# Altium PCB alpha.PcbDoc
Units mil, origin at the board's own origin, x right, y up, seen from the top; angles counter-clockwise.
Board outline 6000 x 4000 mil, 6 copper layers (Component Side, Ground Plane (GND), Inner Layer 1, Inner Layer 2, Power Plane (VCC), Solder Side), stack 51.068 mil thick; 138 components, 107 nets, 521 pads, 80 vias.
Unrouted connection lines stored in the file: 7.
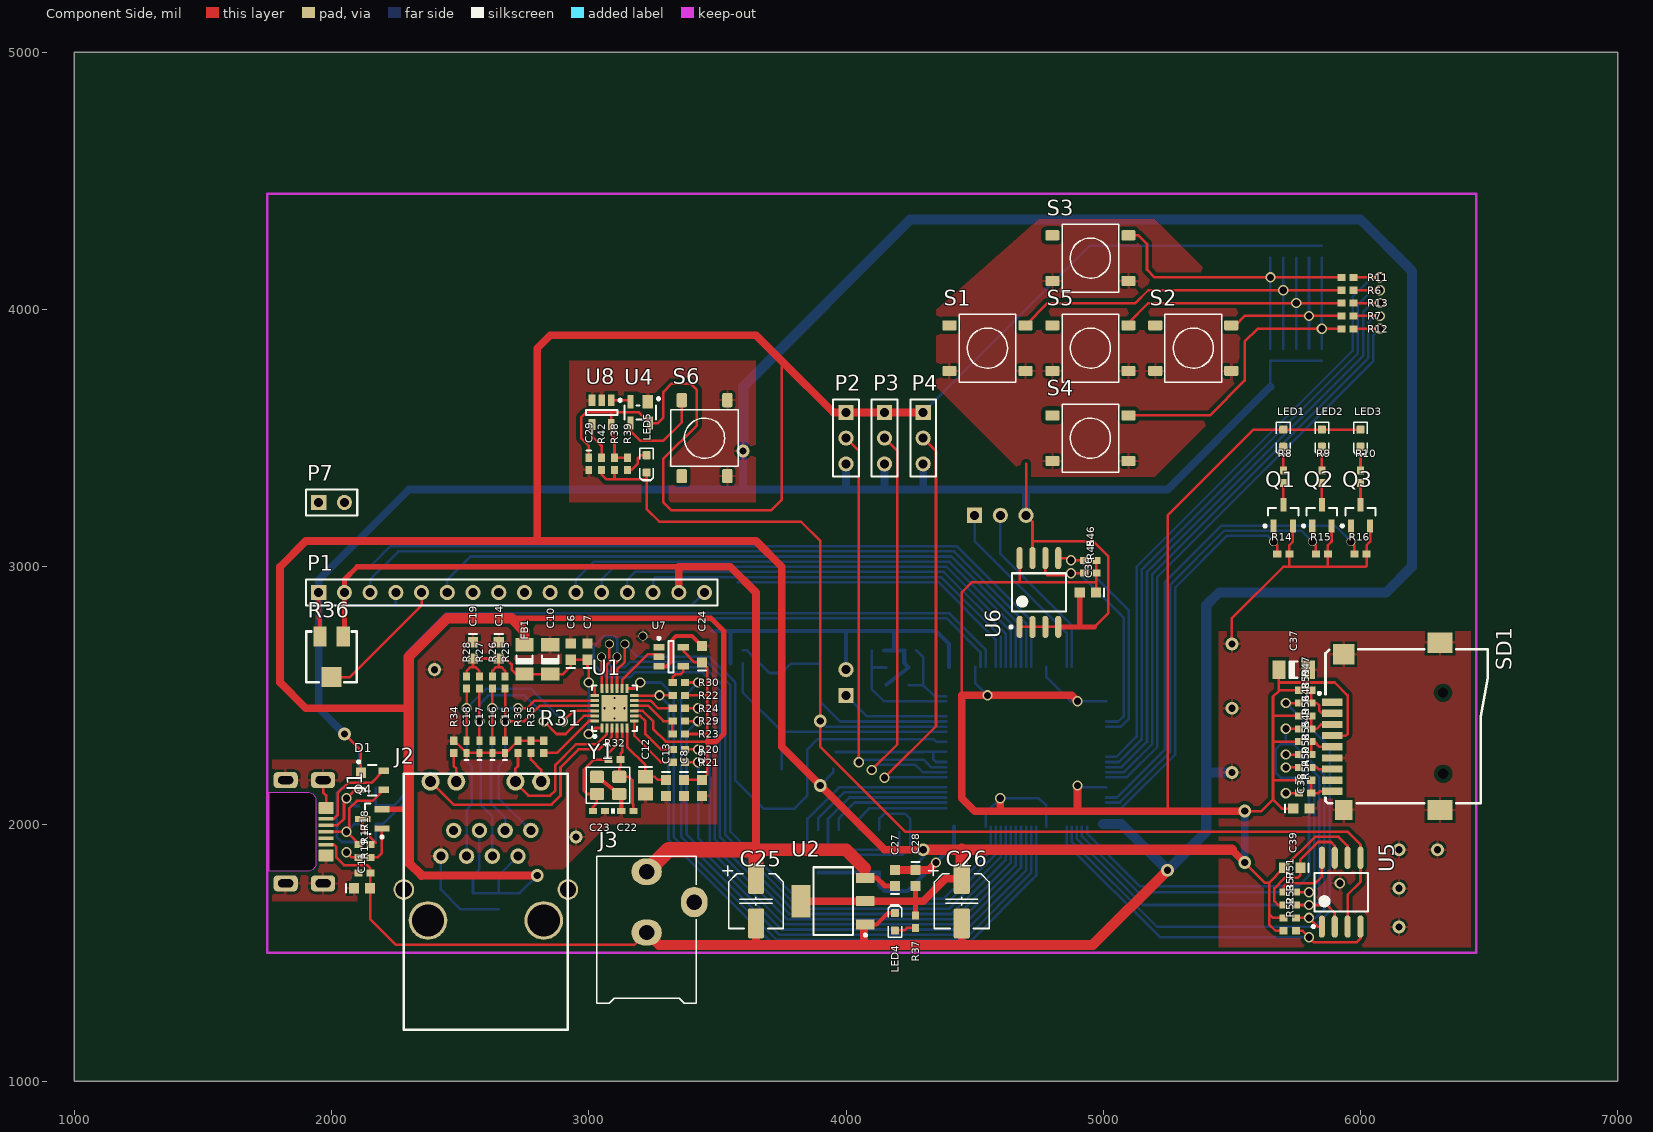
[diagram p0: Component Side view]
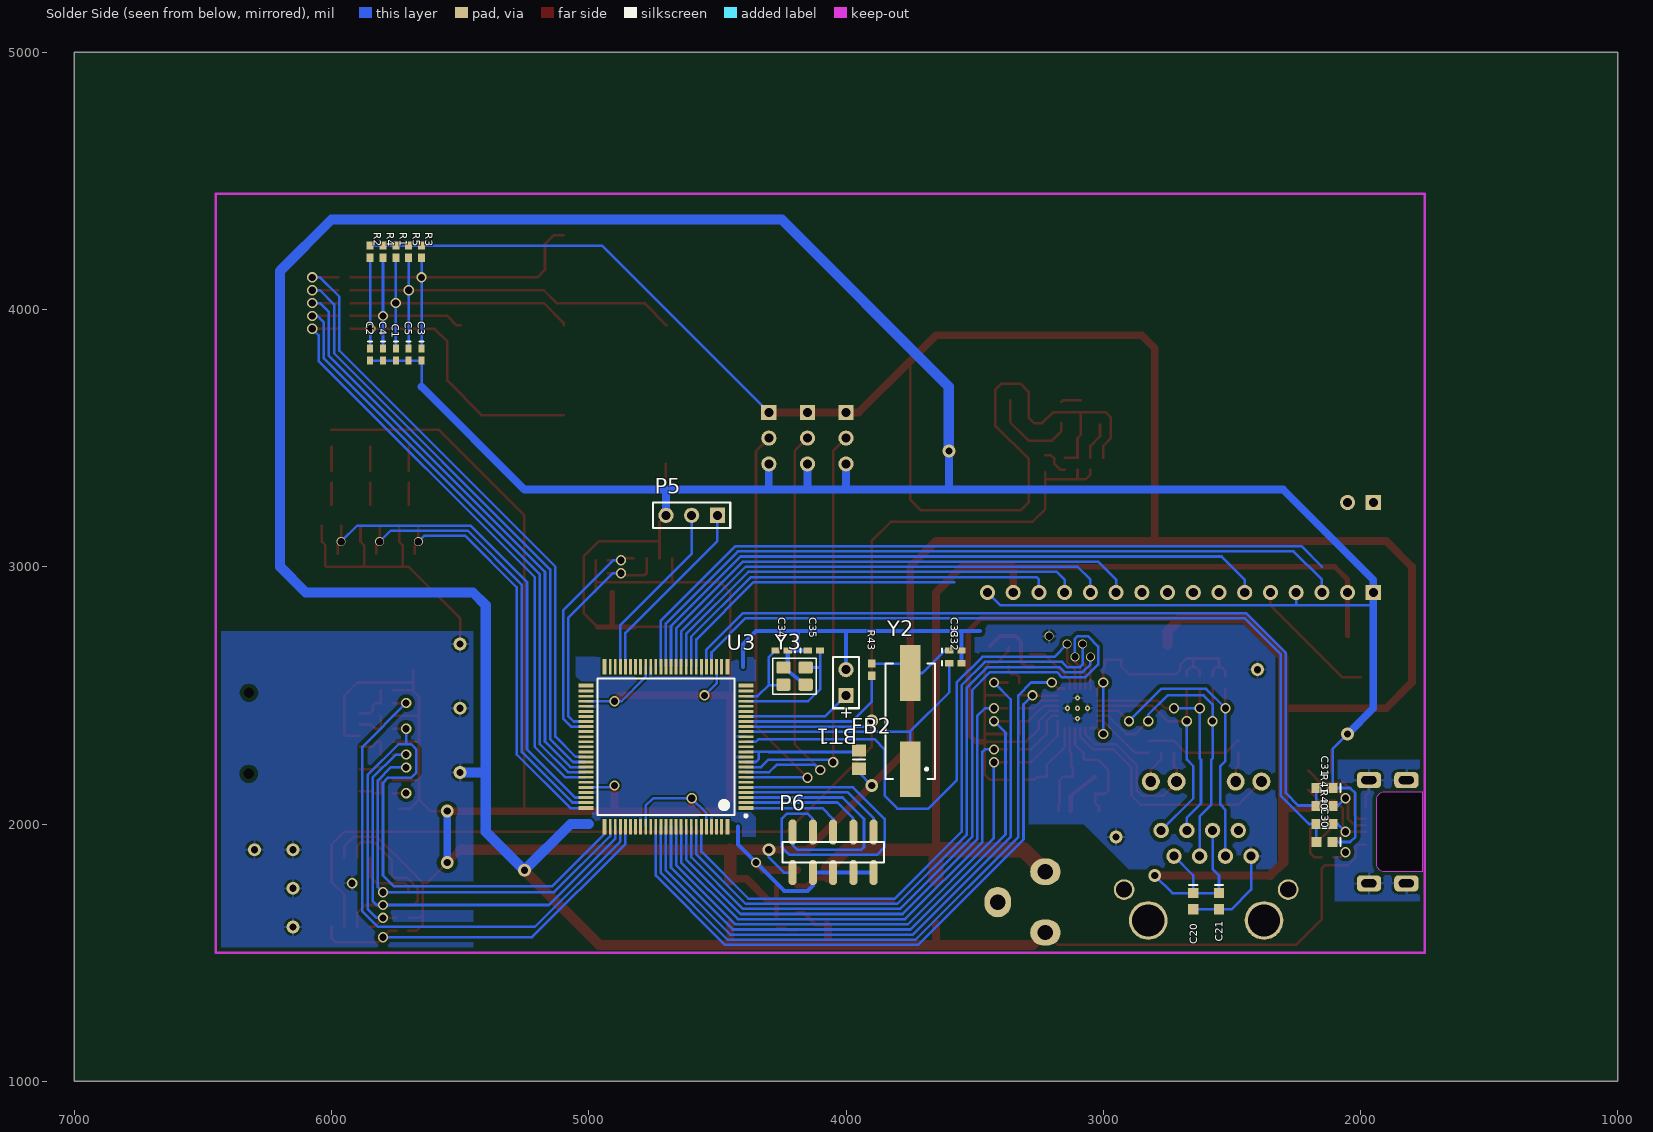
[diagram p1: Solder Side view, seen from below]
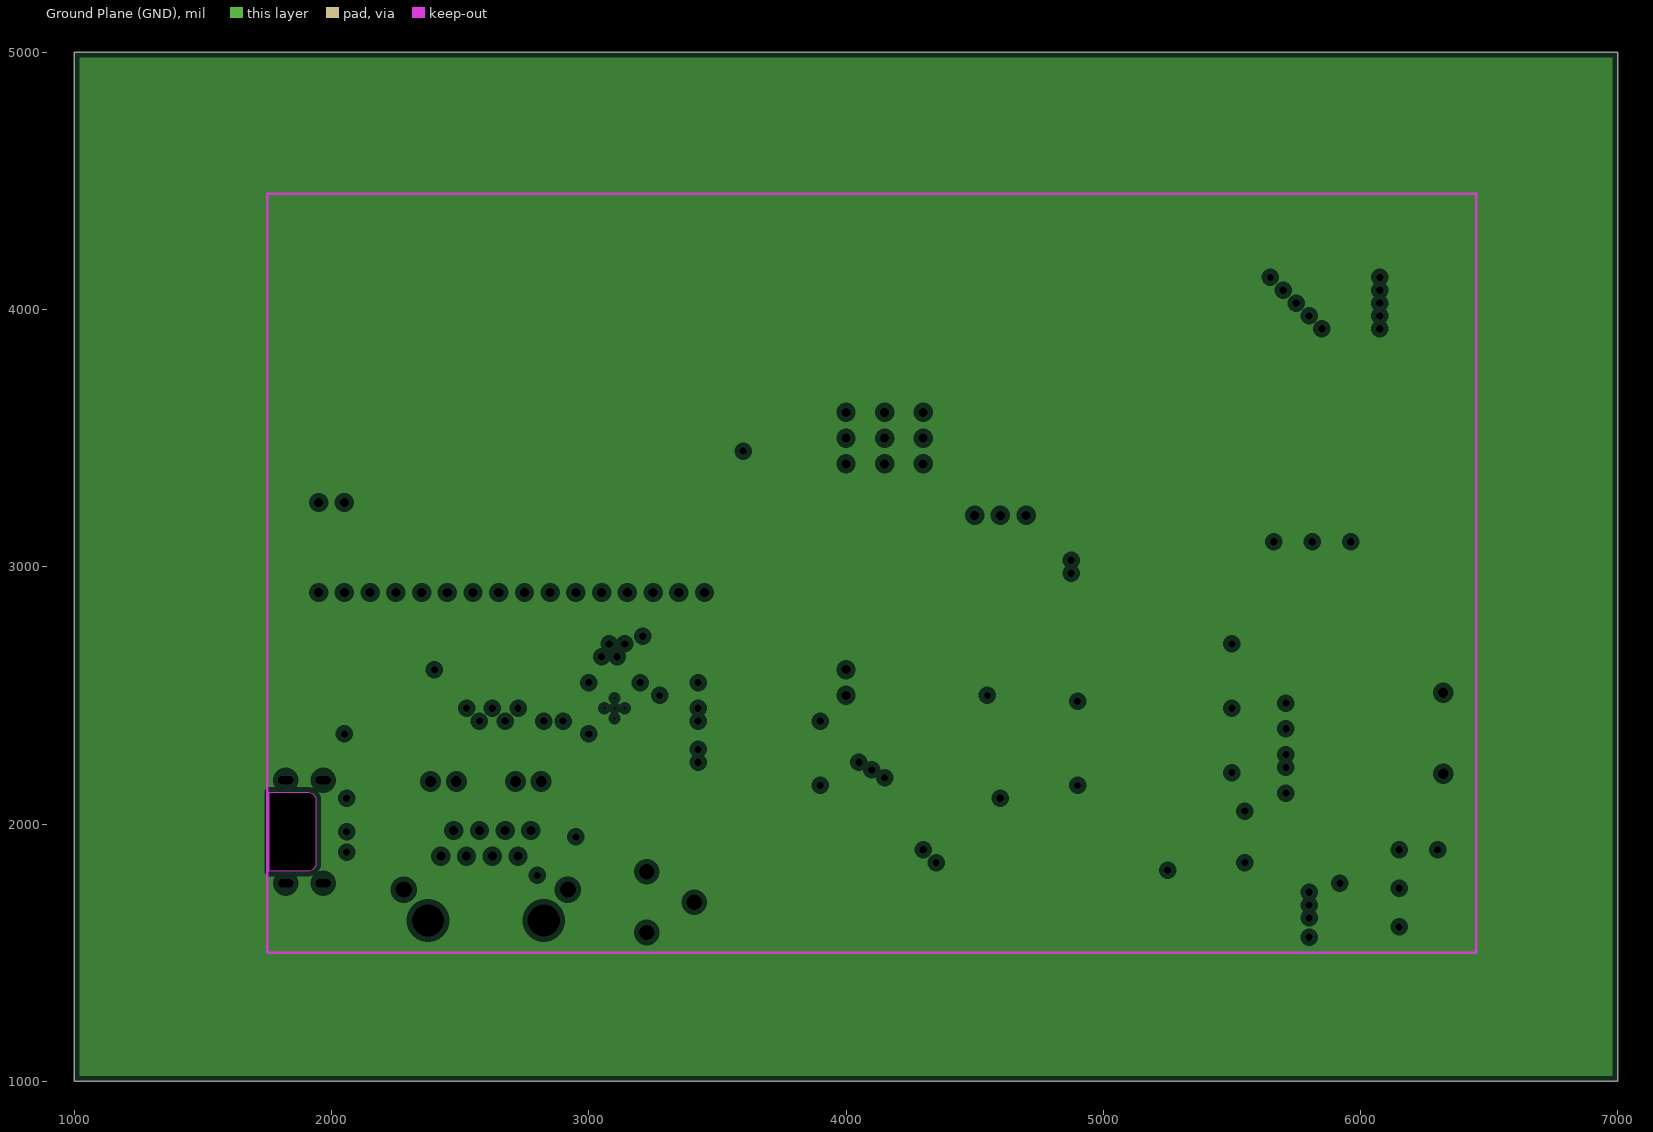
[diagram p2: Ground Plane (GND), clearances drawn from the general rule]
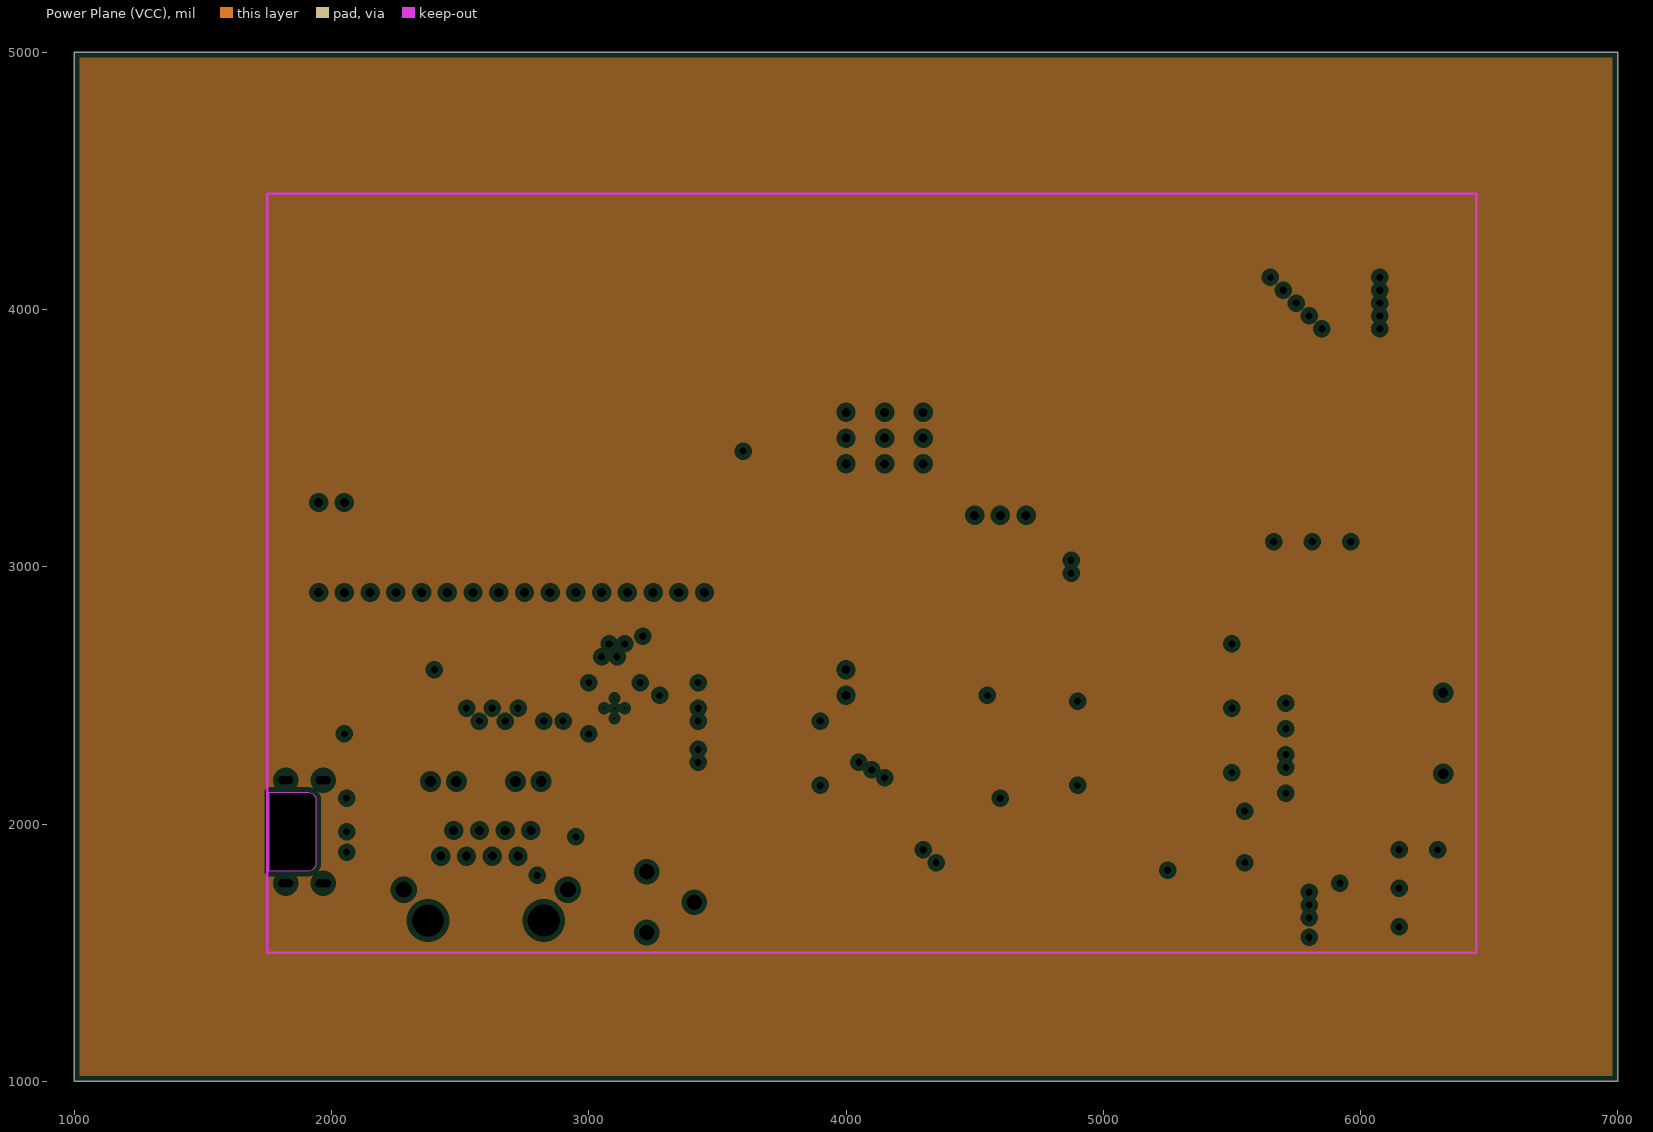
[diagram p3: Power Plane (VCC), clearances drawn from the general rule]

## Layer stack, top to bottom
Top Solder: solder mask 0.4, Solder Resist, Dk 3.5
Component Side: signal copper 1.4
Dielectric 1: core 12.6, FR-4, Dk 4.8
Ground Plane (GND): plane copper 1.417
Dielectric 3: prepreg 5, Dk 4.2
Inner Layer 1: signal copper 1.417
Dielectric 6: core 10, Dk 4.2
Inner Layer 2: signal copper 1.417
Dielectric 5: prepreg 5, Dk 4.2
Power Plane (VCC): plane copper 1.417
Dielectric 4: core 10, Dk 4.2
Solder Side: signal copper 1.4
Bottom Solder: solder mask 0.4, Solder Resist, Dk 3.5

## Board outline
1000,1000 7000,1000 7000,5000 1000,5000

## Design rules (kind name [scope] priority, off if disabled: settings)
Clearance MCU [All vs (InNamedPolygon('MCU GND'))] p1: gap=8
Clearance Polygon [InPolygon] p2: gap=15
Clearance [All] p3: gap=5
PlaneClearance [All] p1: clearance=20
PlaneConnect [All] p1: planeconnectstyle=Relief reliefexpansion=20 reliefentries=4 reliefconductorwidth=10 reliefairgap=10
PolygonConnect [All] p1: connectstyle=Relief reliefconductorwidth=10 reliefentries=4 polygonreliefangle="90 Angle" airgapwidth=10
RoutingVias [All] p1: holewidth=28 width=50 viastyle="Through Hole" minholewidth=20 minwidth=30 maxholewidth=100 maxwidth=100
SolderMaskExpansion [All] p1: expansion=4
UnpouredPolygon [All] p1: allowunpoured=TRUE allowshelved=TRUE
Width VCC [InNet('VCC')] p1: maxlimit=60 minlimit=10 preferedwidth=40 toplayer_minwidth=20 midlayer1_maxwidth=10 midlayer1_prefwidth=10 midlayer2_maxwidth=10 midlayer2_prefwidth=10 bottomlayer_minwidth=20 minimp=50.000000 maximp=50.000000 favimp=50.000000
Width [All] p2: maxlimit=50 minlimit=10 preferedwidth=10 midlayer1_maxwidth=10 midlayer2_maxwidth=10 minimp=50.000000 maximp=50.000000 favimp=50.000000
27 further rules are at their usual default settings.

## Classes and differential pairs
component class "SPI peripherals": C36 C37 C38 C39 P7 R45 R46 R47 R48 R49 R50 R51 R52 R53 R54 R55 R56 R57 R58 R59 SD1 U5 U6
component class LPC1769: BT1 C25 C26 C27 C28 C29 C30 C31 C32 C33 C34 C35 FB2 J3 LED4 LED5 P1 P2 P3 P4 P5 P6 R36 R37 R38 R39 R40 R41 R42 R43 S6 U2 U3 U4 U8 Y2 Y3
component class Etherent: C6 C7 C8 C9 C10 C11 C12 C13 C14 C15 C16 C17 C18 C19 C20 C21 C22 C23 C24 D1 D*1 FB1 J1 J2 Q4 R17 R18 R19 R20 R21 R22 R23 R24 R25 R26 R27 R28 R29 R30 R31 R32 R33 R34 R35 U1 U7 Y1
component class "Direct Digital IO": C1 C2 C3 C4 C5 LED1 LED2 LED3 Q1 Q2 Q3 R1 R2 R3 R4 R5 R6 R7 R8 R9 R10 R11 R12 R13 R14 R15 R16 S1 S2 S3 S4 S5

## Components (designator, comment, footprint, x,y, rotation, side; value= is the part's Value field where it differs from the comment)
BT1 "Battery" BAT-2 4000,2550 r90 bottom
C1 "approved sub OK" CAPC1005N 5750,3825 r270 bottom
C2 "approved sub OK" CAPC1005N 5850,3825 r270 bottom
C3 "approved sub OK" CAPC1005N 5650,3825 r270 bottom
C4 "approved sub OK" CAPC1005N 5800,3825 r270 bottom
C5 "approved sub OK" CAPC1005N 5700,3825 r270 bottom
C6 "approved sub OK" CAPC1608N 2930,2670 r90 top
C7 "approved sub OK" CAPC1608N 2995,2670 r90 top
C8 "approved sub OK" CAPC1608N 3370,2140 r270 top
C9 "approved sub OK" CAPC1608N 3440,2140 r270 top
C10 "approved sub OK" CAPC3216N 2850,2640 r90 top
C11 "approved sub OK" CAPC1608N 2118.5,1750 r0 top
C12 "approved sub OK" CAPC2012N 3220,2150 r270 top
C13 "approved sub OK" CAPC1608N 3300,2140 r270 top
C14 "approved sub OK" CAPC1608N 2650,2675 r270 top
C15 "approved sub OK" CAPC1005N 2675,2300 r90 top
C16 "approved sub OK" CAPC1005N 2625,2300 r90 top
C17 "approved sub OK" CAPC1005N 2575,2300 r90 top
C18 "approved sub OK" CAPC1005N 2525,2300 r90 top
C19 "approved sub OK" CAPC1608N 2550,2675 r270 top
C20 "approved sub OK" CAPC1608N 2650,1700 r270 bottom
C21 "approved sub OK" CAPC1608N 2550,1700 r270 bottom
C22 "approved sub OK" CAPC1005N 3150,2050 r0 top
C23 "approved sub OK" CAPC1005N 3040,2050 r180 top
C24 "approved sub OK" CAPC1608N 3440,2660 r90 top
C25 "Value" CAP_ELEC_5x5.7 3650,1700 r90 top
C26 "Value" CAP_ELEC_5x5.7 4450,1700 r90 top
C27 "approved sub OK" CAPC1608N 4190,1790 r90 top
C28 "approved sub OK" CAPC1608N 4270,1790 r270 top
C29 "approved sub OK" CAPC1005N 3000,3400 r270 top
C30 "approved sub OK" CAPC1608N 2140,1930 r0 bottom
C31 "approved sub OK" CAPC1608N 2140,2140 r0 bottom
C32 "approved sub OK" CAPC1005N 3575,2625 r180 bottom
C33 "approved sub OK" CAPC1005N 3575,2675 r180 bottom
C34 "approved sub OK" CAPC1005N 4250,2675 r0 bottom
C35 "approved sub OK" CAPC1005N 4125,2675 r180 bottom
C36 "approved sub OK" CAPC1608N 4940,2900 r180 top
C37 "Value" CAPC3216N 5740,2600 r0 top
C38 "approved sub OK" CAPC1608N 5770,2060 r0 top
C39 "approved sub OK" CAPC1608N 5735,1830 r180 top
D1 "PRTR5V0U2X" SOT190P230X120-4N 2158.5,2170 r0 top
FB1 "Thick Film" CAPC3216N 2750,2640 r90 top
FB2 "Thick Film" RESC2012N 3950,2250 r270 bottom
J1 "USB Micro Type B" USB_Micro-B_FCI_SMD 1758.5,1970 r270 top
J2 "#NAME?" ARJC01-111002T 2600,1200 r0 top
J3 "CONN_PWR_JACK_2.1x5.5mm" CONN_PWR_JACK_2.1x5.5mm 3225,1275 r180 top
LED1 "Red" LED-0603-GREEN 5700,3500 r270 top
LED2 "Green" LED-0603-GREEN 5850,3500 r270 top
LED3 "Blue" LED-0603-GREEN 6000,3500 r270 top
LED4 "Green" LED-0603-GREEN 4190,1620 r90 top
LED5 "Red" LED-0603-GREEN 3225,3400 r270 top
P1 "Header 16" HDR1X16 1950,2900 r0 top
P2 "Header 3" HDR1X3 4000,3600 r270 top
P3 "Header 3" HDR1X3 4150,3600 r270 top
P4 "Header 3" HDR1X3 4300,3600 r270 top
P5 "Header 3" HDR1X3 4500,3200 r0 bottom
P6 "Header 5X2" "Header 5x2p" 4050,1890 r90 bottom
P7 "Header 2" HDR1X2 1950,3250 r0 top
Q1 "BSH111" SOT23_N 5700,3200 r90 top
Q2 "BSH111" SOT23_N 5850,3200 r90 top
Q3 "BSH111" SOT23_N 6000,3200 r90 top
Q4 "BCX17" SOT23-3N 2158.5,2020 r180 top
R1 "Thick Film" RESC1005N 5750,4225 r270 bottom
R2 "Thick Film" RESC1005N 5850,4225 r270 bottom
R3 "Thick Film" RESC1005N 5650,4225 r270 bottom
R4 "Thick Film" RESC1005N 5800,4225 r270 bottom
R5 "Thick Film" RESC1005N 5700,4225 r270 bottom
R6 "Thick Film" RESC1005N 5950,4075 r0 top
R7 "Thick Film" RESC1005N 5950,3975 r180 top
R8 "Thick Film" RESC1005N 5700,3350 r90 top
R9 "Thick Film" RESC1005N 5850,3350 r270 top
R10 "Thick Film" RESC1005N 6000,3350 r270 top
R11 "Thick Film" RESC1005N 5950,4125 r180 top
R12 "Thick Film" RESC1005N 5950,3925 r180 top
R13 "Thick Film" RESC1005N 5950,4025 r0 top
R14 "Thick Film" RESC1005N 5700,3050 r180 top
R15 "Thick Film" RESC1005N 5850,3050 r0 top
R16 "Thick Film" RESC1005N 6000,3050 r0 top
R17 "Thick Film" RESC1005N 2128.5,1870 r180 top
R18 "Thick Film" RESC1005N 2128.5,1920 r180 top
R19 "Thick Film" RESC1005N 2128.5,1810 r180 top
R20 "Thick Film" RESC1005N 3350,2290 r180 top
R21 "Thick Film" RESC1005N 3350,2240 r180 top
R22 "Thick Film" RESC1005N 3350,2500 r180 top
R23 "Thick Film" RESC1005N 3350,2350 r180 top
R24 "Thick Film" RESC1005N 3350,2450 r180 top
R25 "Thick Film" RESC1005N 2675,2550 r270 top
R26 "Thick Film" RESC1005N 2625,2550 r270 top
R27 "Thick Film" RESC1005N 2575,2550 r270 top
R28 "Thick Film" RESC1005N 2525,2550 r270 top
R29 "Thick Film" RESC1005N 3350,2400 r0 top
R30 "Thick Film" RESC1005N 3350,2550 r180 top
R31 "Thick Film" RESC1005N 2825,2300 r270 top
R32 "Thick Film" RESC1005N 3100,2250 r180 top
R33 "Thick Film" RESC1005N 2725,2300 r90 top
R34 "Thick Film" RESC1005N 2475,2300 r270 top
R35 "Thick Film" RESC1005N 2775,2300 r270 top
R36 "RPot SM" POT4MM-2 2000,2650 r270 top
R37 "Thick Film" RESC1005N 4270,1620 r90 top
R38 "Thick Film" RESC1005N 3100,3400 r90 top
R39 "Thick Film" RESC1005N 3150,3400 r90 top
R40 "Thick Film" RESC1608N 2140,2000 r180 bottom
R41 "Thick Film" RESC1608N 2140,2070 r180 bottom
R42 "Thick Film" RESC1005N 3050,3400 r90 top
R43 "Thick Film" RESC1005N 3900,2600 r270 bottom
R45 "Thick Film" RESC1005N 4950,2975 r180 top
R46 "Thick Film" RESC1005N 4950,3025 r180 top
R47 "Thick Film" RESC1005N 5785,2520 r180 top
R48 "Thick Film" RESC1005N 5785,2420 r180 top
R49 "Thick Film" RESC1005N 5785,2320 r180 top
R50 "Thick Film" RESC1005N 5785,2170 r180 top
R51 "Thick Film" RESC1005N 5725,1735 r180 top
R52 "Thick Film" RESC1005N 5725,1585 r0 top
R53 "Thick Film" RESC1005N 5725,1635 r0 top
R54 "Thick Film" RESC1005N 5785,2120 r180 top
R55 "Thick Film" RESC1005N 5785,2270 r180 top
R56 "Thick Film" RESC1005N 5785,2370 r180 top
R57 "Thick Film" RESC1005N 5725,1685 r180 top
R58 "Thick Film" RESC1005N 5785,2220 r180 top
R59 "Thick Film" RESC1005N 5785,2470 r180 top
S1 "TS-1143S-WP" TS-1143S 4550,3850 r0 top
S2 "TS-1143S-WP" TS-1143S 5350,3850 r0 top
S3 "TS-1143S-WP" TS-1143S 4950,4200 r0 top
S4 "TS-1143S-WP" TS-1143S 4950,3500 r0 top
S5 "TS-1143S-WP" TS-1143S 4950,3850 r0 top
S6 "TS-1143S-WP" TS-1143S 3450,3500 r270 top
SD1 "MicroSD Slot" "MICROSD Slot" 5885,2220 r180 top
U1 "LAN8720A-CP" QFN-MJ24 3100,2450 r90 top
U2 "REG1117-3.3" TI-DCY4_N 3950,1700 r180 top
U3 "LPC1769FBD100" SOT407-1_V 4700,2300 r0 bottom
U4 "CAT811S" SOT-143-RC4_N 3200,3600 r270 top
U5 "AT45DB081D-SU" SOIJ-SM8_N 5925,1735 r90 top
U6 "24LC64" SOIJ-SM8_N 4750,2900 r90 top
U7 "74LVC1G04" SOT-23-CT5_N 3320,2650 r0 top
U8 "74LVC1G125GW" SOT-23-CT5_N 3050,3600 r270 top
Y1 "12MHz" CRYSTAL_4-LCC 3075,2150 r180 top
Y2 "XTAL" HC49/4H_SMX 3750,2400 r90 bottom
Y3 "12MHz" CRYSTAL_4-LCC 4200,2575 r180 bottom

## Footprints (in the part's own frame and the unit in brackets; to place one, negate y for a bottom-side part, rotate by r counter-clockwise, add the part's x,y. Pads: shape width x height; smd on the part's side, far side on the other; paste and mask are expansions set on the pad)
ARJC01-111002T [mil]
  round 60 hole 35: 1(175,775) 2(125,675) 3(75,775) 4(25,675) 5(-25,775) 6(-75,675) 7(-125,775) 8(-175,675)
  round 70 hole 41.34: 9(215,965) 10(115,965) 11(-115,965) 12(-215,965)
  round 80 hole 62.99: 13(319,545) 14(-319,545)
  round 150 hole 125.98: 15(225,425) 16(-225,425)
  silkscreen extent -319,0 319,996
BAT-2 [mm] "Battery; 2 Leads"
  rect 1.5x1.5 hole 0.9: 1(-1.27,0)
  round 1.5 hole 0.9: 2(1.27,0)
  silkscreen extent -2.54,-1.27 2.54,1.27
CAP_ELEC_5x5.7 [mm] "Capacitor, polarized, aluminum can; 5x5.7mm DxH"
  round 0.508 on Mech14: 0(0,0)
  rrect25% 3x1.6 smd: 1(2.2,0) 2(-2.2,0)
  silkscreen extent -2.7,-2.7 3.5,3.3, body extent -2.65,-2.65 2.65,2.65, height 5.7
CAPC1005N [mm] "Chip Capacitor, Body 1.0x0.5mm, IPC Medium Density"
  rect 0.8x0.6 smd: 1(-0.6,0) 2(0.6,0)
  silkscreen extent -1.3,-0.2 -1.3,0.2, body extent -0.55,-0.3 0.55,0.3, height 0.6
CAPC1608N [mm] "Chip Capacitor, Body 1.6x0.8mm, IPC Medium Density"
  rect 1x1 smd: 1(-0.8,0) 2(0.8,0)
  silkscreen extent -1.6,-0.4 -1.6,0.4, body extent -0.87,-0.48 0.87,0.48, height 0.85
CAPC2012N [mm] "Chip Capacitor, Body 2.0x1.3mm, IPC Medium Density"
  rect 1.3x1.5 smd: 1(-0.85,0) 2(0.85,0)
  silkscreen extent -1.8,-0.65 -1.8,0.65, body extent -1.1,-0.72 1.1,0.72, height 1.1
CAPC3216N [mm] "Chip Capacitor, Body 3.2x1.6mm, IPC Medium Density"
  rect 1.3x1.8 smd: 1(-1.45,0) 2(1.45,0)
  silkscreen extent -0.4,-0.8 0.4,0.8, body extent -1.7,-0.9 1.7,0.9, height 1.35
CONN_PWR_JACK_2.1x5.5mm [mm] "Power Connector, 2.1mm ID, 5.5mm OD"
  oval 3x2.6 hole 1.511: 1(0,-13.7) 2(0,-7.7)
  oval 2.6x3 hole 1.511: 3(-4.7,-10.7)
  silkscreen extent -4.9,-15.22 4.92,-0.7, body extent -4.9,-14.1 4.5,0, height 11
CRYSTAL_4-LCC [mm] "SMD Crystal 4-lead leadless package"
  round 0.508 on Mech14: 0(0,0)
  rrect25% 1.4x1.2 smd: 1(-1.1,-0.85) 2(1.1,-0.85) 3(1.1,0.85) 4(-1.1,0.85)
  Component Side lines w0.4: 1.1,-0.85 -1.1,0.85
  silkscreen extent -2.16,-1.78 2.16,1.78, body extent -1.65,-1.3 1.65,1.3, height 0.8
HC49/4H_SMX [mm] "Quartz Crystal, SM; Body 13.4 (inc. leads) x 4.9 mm (LxW max)"
  rect 5.5x2 smd: 1(-4.75,0) 2(4.75,0)
  silkscreen extent -5.7,-2.45 5.7,2.45
HDR1X2 [mm] "Connector; Header; 2 Position"
  rect 1.5x1.5 hole 0.9: 1(0,0)
  round 1.5 hole 0.9: 2(2.54,0)
  silkscreen extent -1.27,-1.27 3.81,1.27
HDR1X3 [mm] "Connector; Header; 3 Position"
  rect 1.5x1.5 hole 0.9: 1(0,0)
  round 1.5 hole 0.9: 2(2.54,0) 3(5.08,0)
  silkscreen extent -1.27,-1.27 6.35,1.27
HDR1X16 [mm] "Connector; Header; 16 Position"
  rect 1.5x1.5 hole 0.9: 1(0,0)
  round 1.5 hole 0.9: 2(2.54,0) 3(5.08,0) 4(7.62,0) 5(10.16,0) 6(12.7,0) 7(15.24,0) 8(17.78,0) 9(20.32,0) 10(22.86,0) 11(25.4,0) 12(27.94,0) 13(30.48,0) 14(33.02,0) 15(35.56,0) 16(38.1,0)
  silkscreen extent -1.27,-1.27 39.37,1.27
"Header 5x2p" [mm] "TSSOP, 40-Leads, Body 9.7x4.4mm, Pitch 0.65mm"
  oval 2.5x0.8 smd: 1(-2,4) 2(2,4) 3(-2,2) 4(2,2) 5(-2,0) 6(2,0) 7(-2,-2) 8(2,-2) 9(-2,-4) 10(2,-4)
  silkscreen extent -1,-5 1,5
LED-0603-GREEN [mm]
  round 0.254 on Mech14: 0(0,0)
  rrect25% 0.8x0.8 smd: A(-0.85,0) K(0.85,0)
  Component Side pour cut-out: -0.5,0.5 0.5,0.5 0.5,-0.5 -0.5,-0.5
  silkscreen extent -1.55,-0.67 1.68,0.67, body extent -0.8,-0.4 0.8,0.4, height 0.75
"MICROSD Slot" [mil] "MicroSD Card Socket"
  rect 80x28 smd: 1(-6,-253.47) 2(-6,-210.16) 3(-6,-166.85) 4(-6,-123.55) 5(-6,-80.24) 6(-6,-36.93) 7(-6,6.38) 8(-6,49.68) 9(-6,92.99)
  rect 98.43x78.74 smd: 10(-424.01,-485) 13(-424.01,166)
  rect 83x78.74 smd: 11(-50,-439.8)
  rect 67x78.74 smd: 12(-50,166)
  round 23.62 hole 40 unplated: MH1(-436.89,25) MH2(-436,-289.96)
  silkscreen extent -609,-459 50,140, body extent -611,-460 21,140, height 67
POT4MM-2 [mm] "Square Trimming Potentiometer"
  rect 2x1.3 smd: CCW(-2,-1.15) CW(-2,1.15)
  rect 2x2 smd: W(2,0)
  silkscreen extent -2.5,-2.5 2.5,2.5
QFN-MJ24 [mm] "QFN, 24-Leads, Body 4x4mm, Pitch 0.5mm, Thermal Pad 2.6x2.6mm, Microchip Recommended"
  rect 0.85x0.3 smd: 1(-1.95,1.25) 2(-1.95,0.75) 3(-1.95,0.25) 4(-1.95,-0.25) 5(-1.95,-0.75) 6(-1.95,-1.25) 13(1.95,-1.25) 14(1.95,-0.75) 15(1.95,-0.25) 16(1.95,0.25) 17(1.95,0.75) 18(1.95,1.25)
  rect 0.3x0.85 smd: 7(-1.25,-1.95) 8(-0.75,-1.95) 9(-0.25,-1.95) 10(0.25,-1.95) 11(0.75,-1.95) 12(1.25,-1.95) 19(1.25,1.95) 20(0.75,1.95) 21(0.25,1.95) 22(-0.25,1.95) 23(-0.75,1.95) 24(-1.25,1.95)
  rect 2.6x2.6 smd paste-1.3: 25(0,0)
  silkscreen extent -2.9,-2.22 2.22,2.22, body extent -2.07,-2.07 2.07,2.07, height 0.9
RESC1005N [mm] "Chip Resistor, Body 1.1x0.5mm, IPC Medium Density"
  rect 0.8x0.7 smd: 1(-0.6,0) 2(0.6,0)
  body extent -0.55,-0.3 0.55,0.3, height 0.4
RESC1608N [mm] "Chip Resistor, Body 1.6x0.8mm, IPC Medium Density"
  rect 0.9x1 smd: 1(-0.85,0) 2(0.85,0)
  silkscreen extent -0.2,-0.4 0.2,0.4, body extent -0.85,-0.48 0.85,0.48, height 0.6
RESC2012N [mm] "Chip Resistor, Body 2.0x1.3mm, IPC Medium Density"
  rect 1.2x1.4 smd: 1(-0.9,0) 2(0.9,0)
  silkscreen extent 0,-0.6 0,0.6, body extent -1.07,-0.7 1.07,0.7, height 0.65
SOIJ-SM8_N [mm] "SOP, 8-Leads, Body 5.2x5.2mm, Pitch 1.27mm, IPC Medium Density"
  oval 2.2x0.6 smd: 1(-3.4,1.905) 2(-3.4,0.635) 3(-3.4,-0.635) 4(-3.4,-1.905) 5(3.4,-1.905) 6(3.4,-0.635) 7(3.4,0.635) 8(3.4,1.905)
  silkscreen extent -3.52,-2.65 1.9,2.88, body extent -2.69,-2.67 2.69,2.67, height 2.04
SOT23-3N [mm] "SOT23, 3-Leads, Body 2.9x1.3mm, Pitch 0.95mm, Lead Span 2.5mm, IPC Medium Density"
  rect 1.5x0.6 smd: 1(-0.95,0.95) 2(-0.95,-0.95) 3(0.95,0)
  silkscreen extent -1.07,-1.5 0.7,1.92, body extent -0.7,-1.5 0.7,1.5, height 1.1
SOT23_N [mm] "SOT23, 3-Leads, Body 2.9x1.3mm, Pitch 0.95mm, Lead Span 2.3mm, IPC Medium Density"
  rect 1.3x0.6 smd: 1(-1.05,0.95) 2(-1.05,-0.95) 3(1.05,0)
  silkscreen extent -1.17,-1.5 0.7,1.92, body extent -0.7,-1.5 0.7,1.5, height 1.1
SOT190P230X120-4N [mm] "SOT143, 4-Leads, Body 2.9x1.3mm, Pitch 1.9mm, Lead Span 2.3mm, IPC Medium Density"
  rect 1x1.05 smd: 1(-1.125,0.75)
  rect 1x0.65 smd: 2(-1.125,-0.95) 3(1.125,-0.95) 4(1.125,0.95)
  silkscreen extent -1.47,-1.5 0.4,1.95, body extent -0.7,-1.52 0.7,1.52, height 1.2
SOT407-1_V [mm] "Thin QFP, 100-Leads, Body 14x14mm, Pitch 0.5mm, NXP Recommended"
  rect 1.5x0.4 smd: 1(-7.9,6.06) 25(-7.9,-6.06) 51(7.9,-6.06) 75(7.9,6.06)
  rect 1.5x0.28 smd: 2(-7.9,5.5) 3(-7.9,5) 4(-7.9,4.5) 5(-7.9,4) 6(-7.9,3.5) 7(-7.9,3) 8(-7.9,2.5) 9(-7.9,2) 10(-7.9,1.5) 11(-7.9,1) 12(-7.9,0.5) 13(-7.9,0) 14(-7.9,-0.5) 15(-7.9,-1) 16(-7.9,-1.5) 17(-7.9,-2) 18(-7.9,-2.5) 19(-7.9,-3) 20(-7.9,-3.5) 21(-7.9,-4) 22(-7.9,-4.5) 23(-7.9,-5) 24(-7.9,-5.5) 52(7.9,-5.5) 53(7.9,-5) 54(7.9,-4.5) 55(7.9,-4) 56(7.9,-3.5) 57(7.9,-3) 58(7.9,-2.5) 59(7.9,-2) 60(7.9,-1.5) 61(7.9,-1) 62(7.9,-0.5) 63(7.9,0) 64(7.9,0.5) 65(7.9,1) 66(7.9,1.5) 67(7.9,2) 68(7.9,2.5) 69(7.9,3) 70(7.9,3.5) 71(7.9,4) 72(7.9,4.5) 73(7.9,5) 74(7.9,5.5)
  rect 0.4x1.5 smd: 26(-6.06,-7.9) 50(6.06,-7.9) 76(6.06,7.9) 100(-6.06,7.9)
  rect 0.28x1.5 smd: 27(-5.5,-7.9) 28(-5,-7.9) 29(-4.5,-7.9) 30(-4,-7.9) 31(-3.5,-7.9) 32(-3,-7.9) 33(-2.5,-7.9) 34(-2,-7.9) 35(-1.5,-7.9) 36(-1,-7.9) 37(-0.5,-7.9) 38(0,-7.9) 39(0.5,-7.9) 40(1,-7.9) 41(1.5,-7.9) 42(2,-7.9) 43(2.5,-7.9) 44(3,-7.9) 45(3.5,-7.9) 46(4,-7.9) 47(4.5,-7.9) 48(5,-7.9) 49(5.5,-7.9) 77(5.5,7.9) 78(5,7.9) 79(4.5,7.9) 80(4,7.9) 81(3.5,7.9) 82(3,7.9) 83(2.5,7.9) 84(2,7.9) 85(1.5,7.9) 86(1,7.9) 87(0.5,7.9) 88(0,7.9) 89(-0.5,7.9) 90(-1,7.9) 91(-1.5,7.9) 92(-2,7.9) 93(-2.5,7.9) 94(-3,7.9) 95(-3.5,7.9) 96(-4,7.9) 97(-4.5,7.9) 98(-5,7.9) 99(-5.5,7.9)
  silkscreen extent -8.02,-6.75 6.75,6.93, body extent -7,-7 7,7, height 1.6
SOT-23-CT5_N [mm] "SOT23, 5-Leads, Body 2.9x1.6mm, Pitch 0.95mm, Lead Span 2.7mm, IPC Medium Density"
  rect 1.1x0.65 smd: 1(-1.2,0.95) 2(-1.2,0) 3(-1.2,-0.95) 4(1.2,-0.95) 5(1.2,0.95)
  silkscreen extent -1.32,-1.55 0.25,1.95, body extent -0.9,-1.55 0.9,1.55, height 1.45
SOT-143-RC4_N [mm] "SOT143, 4-Leads, Body 2.9x1.3mm, Pitch 1.9mm, Lead Span 2.4mm, IPC Medium Density"
  rect 1.3x1 smd: 1(-1.05,0.75)
  rect 1.3x0.6 smd: 2(-1.05,-0.95) 3(1.05,-0.95) 4(1.05,0.95)
  silkscreen extent -1.47,-1.55 0.7,1.93, body extent -0.7,-1.52 0.7,1.53, height 1.22
TI-DCY4_N [mm] "SOT223, 4-Leads, Body 6.5x3.5mm, Pitch 2.3mm, IPC Medium Density"
  rect 1.85x1 smd: 1(-3.175,2.3) 2(-3.175,0) 3(-3.175,-2.3)
  rect 1.85x3.2 smd: 4(3.175,0)
  silkscreen extent -3.3,-3.35 1.95,3.47, body extent -1.85,-3.35 1.85,3.35, height 1.8
TS-1143S [mm] "6.5x6.5mm SMD tact switch 4.3mm stem"
  round 0.508 on Mech14: 0(0,0)
  rrect25% 1.4x1 smd: 1(-3.75,2.25) 1(3.75,2.25) 2(-3.75,-2.25) 2(3.75,-2.25)
  silkscreen extent -2.79,-3.35 2.79,3.35, body extent -4,-3.25 4,3.25, height 4.3
USB_Micro-B_FCI_SMD [mm]
  round 0.508 on Mech14: 0(0,0)
  rrect20% 0.35x1.5 smd: 1(-1.3,5.6) 2(-0.65,5.6) 3(0,5.6) 4(0.65,5.6) 5(1.3,5.6)
  rrect50% 1.6x2.4 hole 0.8 slot 1.5 at 90 deg: SH(-5.1,5.3) SH(-5.1,1.6) SH(5.1,5.3) SH(5.1,1.6)
  rrect20% 1.2x1.5 smd: SH(-2.35,5.6) SH(2.35,5.6)
  Keep-Out Layer board cut-out: -3.9,0 -3.9,3.797 -3.839,4.103 -3.666,4.362 -3.406,4.536 -3.1,4.597 -3.1,4.597 3.1,4.597 3.406,4.536 3.666,4.362 3.839,4.103 3.9,3.797 3.9,3.797 3.9,0
  body extent -5.35,-21.58 5.35,5.8, height 4.67

## Part data
BT1: "Multicell Battery"
C1 C2 C3 C4 C5 C6 C7 C8 C9 C10 C11 C12 C13 C14 C15 C16 C17 C18 C19 C20 C21 C22 C23 C24 C27 C28 C29 C30 C31 C32 C33 C34 C35 C36 C38 C39: library part CAPC_100n_0805, "Capacitor SMD Cer 100nF 10% 50V X7R 0805"
C25 C26: library part CAPT_100u_1210_6V3, "Capacitor SMD Tantalum 100uF 20% 6.3V 1210"
C37: library part CAPT_1u_0805_10V, "Capacitor SMD Tantalum 1uF 20% 10V 0805"
FB1 R6 R7 R11 R12 R13 R17 R18 R19 R20 R21 R22 R23 R24 R25 R26 R27 R28 R29 R30 R31 R32 R33 R34 R35 R37 R42 R45 R46 R47 R48 R49 R50 R51 R52 R53 R54 R55 R56 R57 R58 R59: library part RES_330R_0402_5%, "Resistor SMD chip 330 Ohm 0.063W 5% 0402"
FB2 R1 R2 R3 R4 R5 R8 R9 R10 R14 R15 R16 R38 R40 R41 R43: library part RES_10K_0805_5%, "Resistor SMD chip 10k Ohm 0.125W 5% 0805"
J1: library part USB_Micro_TypeB_FCI, "Connector SMD-THD USB Micro Type B middle mount"
J2: library part ARJC01-111002T, "10/100 Base-Tx Tap Up RJ45 with LED"
J3: "Power Connector, THT, 2.1mm ID, 5.5mm OD"
LED1: library part LED_SMD_Red_0805_6mcd, "LED 0805 SMD Red 6mcd 621nm"
LED2: library part LED_SMD_Green_0805_6mcd, "LED, 0805 SMD, Green"
LED3: library part LED_SMD_Blue_0805_100mcd, "LED 0805 SMD Blue 100mcd 470nm"
LED4: library part LED_SMD_Green_0805_8mcd, "LED, 0805 SMD, Green"
LED5: library part LED_SMD_Red_0805, "LED, 0805 SMD, Red"
P1: "Header, 16-Pin"
P2 P3 P4 P5: "Header, 3-Pin"
P6: "Header, 5-Pin, Dual row"
P7: "Header, 2-Pin"
Q1 Q2 Q3: library part BSH103, "N-channel Enhancement Mode MOSFET"
Q4: "PNP General Purpose Transistors"
R36: "Square Trimming Potentiometer"
R39: library part RES_470R_0603_5%, "Resistor SMD chip 470 Ohm 0.1W 5% 0603"
S1 S2 S3 S4 S5 S6: library part SW_SMD_PB_4.3mm, "Switch SMD Tact 4.3mm Stem"
U2: "Single Output LDO, 800 mA, Fixed 3.3 V Output, 3.8 to 15 V Input, with Internal Current Limiting, 4-pin SOT-223 (DCY), -40 to 125 degC, Green (RoHS & no Sb/Br)"
U3: "32-bit ARM Cortex-M3 MCU, 512 kB Flash, 64 kB SRAM, Ethernet, USB 2.0 Device/Host/OTG, 12-Bit ADC, DAC, I2S, 100-Pin LQFP"
Y1 Y3: library part CRYSTAL_27M12, "Oscillator Crystal 27.12 MHz 10ppm"
Y2: "Crystal Oscillator"

## Via types
v1: diameter 40, hole 28, Component Side to Solder Side, 48 vias
v2: diameter 50, hole 28, Component Side to Solder Side, 18 vias
v3: diameter 35, hole 28, Component Side to Solder Side, 8 vias
v4: diameter 19.68, hole 7.87, Component Side to Solder Side, 5 vias
v5: diameter 40, hole 28, Component Side to Solder Side, tented top, 1 vias

## Nets (pads, with @x,y where several pads share a name; then routed paths per layer and width w, separated by ;. In a path a pad name is that pad's centre, name@x,y a point inside that pad or via, vN(x,y) a via of type N, cw(c..) or ccw(c..) an arc to the next point about the centre after c; other vN are vias at no path point)
3V3: C8.1 C9.1 C20.1 C21.1 C24.1 C26.1 C28.2 C29.1 C36.1 C37.1 C38.1 C39.2 FB1.2 FB2.2 J2.2 J2.5 LED1.A LED2.A LED3.A P2.1 P3.1 P4.1 P6.1 Q4.2 R1.1 R2.1 R3.1 R4.1 R5.1 R22.1 R23.1 R37.2 R38.2 R39.2 R45.1 R46.1 R47.2 R48.2 R49.2 R50.2 R52.1 R53.1 SD1.4 U1.9 U2.2 U2.4 U3.28 U3.42 U3.54 U3.71 U3.84 U3.96 U4.4 U5.6 U6.8 U7.5 U8.5 | length 27746.8
  Component Side w10: C29.1 3000,3470 2970,3500 2970,3580 2990,3600 3196.06,3600 U4.4 3268.66,3558.66 3290,3580 3290,3680 3321.55,3711.55 3396.1,3711.55 3420,3687.66 3420,3550 3290,3420 3290,3250 3320,3220 3710,3220 3750,3260 3750,3800 ; 3087.4,3597.4 U8.5 3087.4,3512.6 3100,3500 R38.2 R39.2 ; U1.9 3209.84,2440.16 3250,2400 3250,2370 3300,2320 3460,2320 ; U7.5 3370,2684.65 3370,2670 3411.5,2628.5 C24.1 3460,2608.5 3460,2500 ; C8.1 C9.1 3460,2191.5 3460,2320 ; R23.1 3460,2350 ; R22.1 3460,2500 ; 4450,2500 4450,2900 4490,2940 4675,2940 ; U6.8 4675,2940 ; C36.1@4973.62,2902.13 4973.62,2940 ; R46.1 R45.1 4973.62,2940 ; 5250,2050 5250,3200 5583.46,3533.46 LED1.A LED2.A LED3.A ; v2(5550,1850) 5628.5,1771.5 5645,1771.5 ; v2(5550,2050) 5615,2050 5660,2095 ; 5660,2170 R50.2 ; 5660,2320 R49.2 ; 5660,2420 R48.2 ; C37.1 5682.91,2550 ; 5685,2520 R47.2 ; R52.1 5670,1585 5645,1610 5645,1650 ; R53.1 5660,1635 5645,1650 ; C38.1 5695,2060 5660,2095 ; SD1.4 5943.55,2343.55 5950,2350 5950,2500 5900,2550 5682.91,2550 ; U5.6 5950,1915 5915,1950 5823.5,1950 C39.2 5645,1771.5 ; 3460,2320 3460,2350 ; 3460,2350 3460,2500 ; 4675,2940 4973.62,2940 ; 5645,1650 5645,1771.5 ; 5660,2095 5660,2495 5682.91,2517.91 5682.91,2550
  Component Side w20: Q4.2 2300,2057.4 ; 2700,2800 3475,2800 3525,2750 3525,2350 3495,2320 3460,2320 ; R37.2 4270,1700 C28.2
  Component Side w30: 2300,2450 1900,2450 1800,2550 1800,3000 1900,3100 3650,3100 3750,3000 3750,2300 v2(3900,2150) 4150,1900 v2(4300,1900) ; 2350,1800 v2(2800,1800) ; 2800,3100 2800,3850 2850,3900 3650,3900 3750,3800 3950,3600 P2.1 P3.1 P4.1 ; U2.4 U2.2 4270,1700 4300,1700 4386.61,1786.61 C26.1 ; v1(4600,2100) 4600,2050 ; v1(4900,2150) 4900,2050 ; v1(4900,2477.17) 4877.17,2500 v1(4550,2500) 4450,2500 4450,2100 4500,2050 4600,2050 ; 5500,1900 v2(5550,1850) ; v2(5550,2050) 5250,2050 4900,2050 ; 4600,2050 4900,2050
  Component Side w35: 2300,1850 2350,1800
  Component Side w40: 2300,1850 2300,2057.4 2300,2450 2300,2650 2450,2800 2700,2800 2750,2750 FB1.2 ; v2(4300,1900) 4450,1900 5500,1900
  Component Side w50: C26.1 4450,1900
  Solder Side w10: J2.5 2575,1825 2550,1800 C21.1 C20.1 ; J2.2 2650,1800 C20.1 ; v2(2800,1800) 2731.5,1731.5 C20.1 ; v2(3900,2150) 3950,2200 FB2.2 ; P6.1 4241.26,1811.26 4300,1870 v2(4300,1900) ; P4.1 4948.62,4248.62 R3.1 R5.1 R1.1 R4.1 R2.1 ; U3.28 4503.15,2546.85 v1(4550,2500) ; U3.96 4542.52,2042.52 v1(4600,2100) 4750,2100 4778.74,2071.26 U3.84 ; U3.42 4778.74,2571.26 4872.83,2477.17 v1(4900,2477.17) U3.54 ; v1(4900,2150) 4907.48,2142.52 U3.71
  Solder Side w30: v2(5550,1850) v2(5550,2050)
AD0_0: P2.2 U3.9 | length 1635.7
  Component Side w10: P2.2 4050,3450 v1(4050,2240)
  Solder Side w10: v1(4050,2240) 4060,2250 4301.26,2250 4330,2221.26 U3.9
AD0_1: P3.2 U3.8 | length 1661.2
  Component Side w10: v1(4100,2210) 4200,2310 4200,3450 P3.2
  Solder Side w10: v1(4100,2210) 4120,2230 4270,2230 4298.43,2201.57 U3.8
AD0_2: P4.2 U3.7 | length 1663.3
  Component Side w10: v1(4150,2180) 4350,2380 4350,3450 P4.2
  Solder Side w10: v1(4150,2180) 4151.89,2181.89 U3.7
BTN_CENTER: R13.2 U3.67 | length 2398.7
  Component Side w10: R13.2 v1(6075,4025)
  Solder Side w10: U3.67 5071.26,2221.26 5170,2320 5170,2980 6010,3820 6010,3990 6045,4025 v1(6075,4025)
BTN_DOWN: R12.1 U3.69 | length 2332.6
  Component Side w10: R12.1 v1(6075,3925)
  Solder Side w10: U3.69 5091.89,2181.89 5210,2300 5210,2960 6050,3800 6050,3900 v1(6075,3925)
BTN_LEFT: R6.2 U3.66 | length 2423
  Component Side w10: R6.2 v1(6075,4075)
  Solder Side w10: U3.66 5060.94,2240.94 5150,2330 5150,2990 5990,3830 5990,4020 6045,4075 v1(6075,4075)
BTN_RIGHT: R7.1 U3.68 | length 2368.6
  Component Side w10: R7.1 v1(6075,3975)
  Solder Side w10: U3.68 5081.57,2201.57 5190,2310 5190,2970 6030,3810 6030,3950 6055,3975 v1(6075,3975)
BTN_UP: R11.1 U3.65 | length 2447.2
  Component Side w10: R11.1 v1(6075,4125)
  Solder Side w10: U3.65 5050.63,2260.63 5130,2340 5130,3000 5970,3840 5970,4050 6045,4125 v1(6075,4125)
ENET-CRS: R24.1 U3.92 | length 2075.4
  Component Side w10: R24.1 v1(3425,2450)
  Solder Side w10: v1(3425,2450) 3460,2450 3490,2420 3490,1940 3780,1650 4410,1650 4621.26,1861.26 U3.92
ENET-MDC: U1.13 U3.87 | length 2604.5
  Component Side w10: U1.13@3150,2527.56 U1.13 3176.77,2526.77 v1(3200,2550)
  Solder Side w10: v1(3200,2550) 3280,2550 3330,2500 3330,1950 3730,1550 4460,1550 4719.69,1809.69 U3.87
ENET-MDIO: R22.2 U1.12 U3.86 | length 2610.3
  Component Side w10: U1.12 v1@3260.79,2499.21 ; v1(3275,2500) R22.2
  Solder Side w10: v1(3275,2500) 3310,2465 3310,1940 3720,1530 4470,1530 4739.37,1799.37 U3.86
ENET-REF_CLK: R30.1 U3.88 | length 2449.6
  Component Side w10: R30.1@3372.24,2550 v1(3425,2550)
  Solder Side w10: v1(3425,2550) 3360,2485 3360,1950 3740,1570 4450,1570 4700,1820 U3.88
ENET-RX_ER: R29.2 U3.89 | length 2223.2
  Component Side w10: R29.2@3372.24,2400 R29.2 v1(3425,2400)
  Solder Side w10: v1(3425,2400) 3380,2355 3380,1960 3750,1590 4440,1590 4680.31,1830.32 U3.89
ENET-RXD0: R20.1 U3.91 | length 1975.3
  Component Side w10: R20.1 v1(3425,2290)
  Solder Side w10: v1(3425,2290) 3460,2290 3470,2280 3470,1930 3770,1630 4420,1630 4640.94,1850.94 U3.91
ENET-RXD1: R21.1 U3.90 | length 1964.6
  Component Side w10: R21.1 v1(3425,2240)
  Solder Side w10: v1(3425,2240) 3425,1945 3760,1610 4430,1610 4660.63,1840.63 U3.90
ENET-TX_EN: U1.16 U3.93 | length 2908.6
  Component Side w10: U1.16 3090.16,2610.16 3110,2630 v3(3110,2650)
  Solder Side w10: v3(3110,2650) 3110,2720 3100,2730 3060,2730 3020,2690 3020,2620 3070,2570 3160,2570 3180,2590 3440,2590 3510,2520 3510,1950 3790,1670 4400,1670 4601.57,1871.57 U3.93
ENET-TXD0: U1.17 U3.95 | length 2639
  Component Side w10: U1.17 3070.47,2620.47 3080,2630 v3(3080,2700)
  Solder Side w10: v3(3080,2700) 3080,2620 3090,2610 3140,2610 3160,2630 3460,2630 3550,2540 3550,1970 3810,1710 4380,1710 4562.2,1892.2 U3.95
ENET-TXD1: U1.18 U3.94 | length 2607.7
  Component Side w10: v3(3050,2650) 3050.79,2649.21 U1.18
  Solder Side w10: v3(3050,2650) 3050,2620 3080,2590 3150,2590 3170,2610 3450,2610 3530,2530 3530,1960 3800,1690 4390,1690 4581.89,1881.89 U3.94
FLASH_SSEL: R52.2 U3.80 U5.4 | length 1481.5
  Component Side w10: R52.2 5775,1585 v1(5800,1560) 5820,1540 5985,1540 6000,1555 U5.4
  Solder Side w10: U3.80 4857.48,1922.52 5220,1560 v1(5800,1560)
GND: BT1.2 C1.2 C2.2 C3.2 C4.2 C5.2 C6.2 C7.2 C8.2 C9.2 C10.2 C11.2 C12.2 C13.2 C14.1 C15.1 C16.1 C17.1 C18.1 C19.1 C20.2 C21.2 C22.1 C23.1 C24.2 C25.2 C26.2 C27.2 C28.1 C29.2 C30.1 C31.1 C32.2 C33.2 C34.1 C35.1 C36.2 C37.2 C38.2 C39.1 D1.1 J1.5 J2.8 J3.2 LED4.K P1.1 P1.4 P1.16 P2.3 P3.3 P4.3 P5.3 P6.3 P6.5 P6.7 P6.9 P7.1 P7.2 Q1.2 Q2.2 Q3.2 R14.1 R15.2 R16.2 R19.1 R31.1 R33.2 R34.1 R35.1 R36.CCW R57.2 S1.2 S2.2 S3.2 S4.2 S5.2 S6.1 SD1.6 SD1.10 SD1.11 SD1.12 SD1.13 U1.25 U2.1 U3.11 U3.15 U3.31 U3.41 U3.55 U3.72 U3.83 U3.97 U4.1 U5.7 U6.1 U6.2 U6.3 U6.4 U6.7 U7.3 U8.2 U8.3 Y1.2 Y1.4 Y3.2 Y3.4 | length 25497.5
  Component Side w10: J1.5 2009.68,1918.82 2018.5,1910 2018.5,1870 2048.5,1840 2138.5,1840 2150,1828.5 C11.2 2150,1630 2250,1530 3176.85,1530 J3.2 ; v2(2050,2350) 2114.21,2285.79 D1.1 ; R34.1 2477.76,2323.62 C18.1 C17.1 C16.1 C15.1 2677.76,2276.38 R33.2 R35.1 R31.1 ; U6.1 U6.2 U6.3 U6.4 ; 4700,3400 P5.3 4725,3175 U6.7 ; 4725,3100 4960,3100 5020,3040 5020,2820 4966.14,2766.14 ; v2(5500,2700) 5500,2800 5700,3000 6020,3000 6023.62,3003.62 R16.2 6023.62,3083.62 6037.4,3097.4 Q3.2 ; R57.2 5680,1685 5665,1700 5665,1750 5705.31,1790.31 5755.31,1790.31 5766.5,1801.5 5766.5,1861.5 5835,1930 5885,1930 5900,1915 U5.7 ; 5723.62,3003.62 R14.1 5723.62,3083.62 5737.4,3097.4 Q1.2 ; 5873.62,3003.62 R15.2 5873.62,3083.62 5887.4,3097.4 Q2.2
  Component Side w15.75: P1.1 1950,2800 1954.72,2795.28 R36.CCW ; Y1.4 3126.38,2108.46 C22.1 ; U7.3 3302.6,2612.6 3320,2630 3320,2710 3340,2730 3401.5,2730 C24.2 ; U2.1 4119.45,1609.45 4163.46,1653.46 LED4.K
  Component Side w20: U6.4 4966.14,2766.14 ; 4908.5,2767.64 C36.2
  Component Side w30: 3650,1530 C25.2 ; 4070,1530 4070,1604.45 U2.1 ; C27.2 4321.5,1821.5 v1(4350,1850) ; 4450,1530 C26.2
  Component Side w40: J3.2 3273.15,1530 3650,1530 4070,1530 4450,1530 4960,1530 v2(5250,1820)
  Solder Side w10: 1950,2850 2250,2850 ; v2(2050,2350) 2108.5,2291.5 C31.1 2040,2140 2020,2120 2020,1950 2040,1930 C30.1 ; P1.4 2250,2850 ; J2.8 2425,1745 2501.5,1668.5 C21.2 C20.2 ; P1.16 3400,2850 2250,2850 ; 5650,3700 C3.2 C5.2 C1.2 C4.2 C2.2
  Solder Side w15.75: 3480,2750 4000,2750 ; C32.2 C33.2 3551.38,2748.62 ; P6.9 P6.7 P6.5 P6.3 4128.74,1761.26 4150,1740 4240,1740 4420,1920 4420,1990 ; BT1.2 4000,2750 ; C35.1 4187.5,2675 ; 4187.5,2747.5 4187.5,2675 ; Y3.4 4226.38,2625.39 C34.1 4187.5,2675 ; 4400,2610 4400,2700 4350,2750 4000,2750
  Solder Side w30: v2(2050,2350) 1950,2450 1950,2850 P1.1 1950,2950 2300,3300 3600,3300 ; v2(3600,3450) 3600,3300 ; 4000,3310 P2.3 ; 4150,3310 P3.3 ; P4.3 4300,3300 ; P5.3 4700,3300 ; 5650,3700 5250,3300 4700,3300 ; 3600,3300 4300,3300 ; 4300,3300 4700,3300
  Solder Side w40: v2(3600,3450) 3600,3700 4250,4350 6000,4350 6200,4150 6200,3000 6100,2900 5450,2900 5400,2850 5400,2200 ; 5000,2000 5070,2000 v2(5250,1820) 5400,1970 5400,2200 ; v2(5500,2200) 5400,2200
  other v1: 5920,1770
  other v2: 6150,1600 6150,1750 6150,1900 6300,1900 2950,1950 5500,2450 2400,2600
  other v3: 3210,2730
  other v4: 3100,2410.63 3060.63,2450 3100,2450 3139.37,2450 3100,2489.37
I2C_SCL: R45.2 U3.58 U6.6 | length 951.8
  Component Side w10: U6.6 4775,2975 4782.5,2967.5 4867.5,2967.5 v1(4875,2975) R45.2
  Solder Side w10: v1(4875,2975) 4905,2975 5080,2800 5080,2420 5058.43,2398.43 U3.58
I2C_SDA: R46.2 U3.59 U6.5 | length 932.7
  Component Side w10: U6.5 4866.14,3033.86 v1(4875,3025) R46.2
  Solder Side w10: v1(4875,3025) 4905,3025 5100,2830 5100,2410 5068.74,2378.74 U3.59
JTAG_RESET: P6.10 U3.4 | length 581.8
  Solder Side w10: P6.10@3892.52,1978.74 3892.52,2022.52 3992.83,2122.83 U3.4
JTAG_TCLK_SWCLK: P6.4 U3.5 | length 1412.9
  Solder Side w10: P6.4@4128.74,1978.74 4128.74,2018.74 4150,2040 4230,2040 4250,2020 4250,1910 4220,1880 3880,1880 3850,1910 3850,2020 3972.52,2142.52 U3.5
JTAG_TDI: P6.8 U3.2 | length 486
  Solder Side w10: P6.8@3971.26,1978.74 3971.26,2021.26 4033.46,2083.46 U3.2
JTAG_TDO_SWO: P6.6 U3.1 | length 397.4
  Solder Side w10: P6.6@4050,1978.74 4050,2020 4091.42,2061.42 U3.1
JTAG_TMS_SWDIO: P6.2 U3.3 | length 943.5
  Solder Side w10: P6.2 4207.48,1917.48 4190,1900 3940,1900 3930,1910 3930,2020 4013.15,2103.15 U3.3
LCD_BL: U3.32 | length 1200.9
  Solder Side w10: 3580,2940 4360,2940 4581.89,2718.11 U3.32
LCD_D4: P1.11 U3.36 | length 2045.9
  Solder Side w10: P1.11 2950,2950 3020,3020 4400,3020 4660.63,2759.37 U3.36
LCD_D5: P1.12 U3.35 | length 1903.6
  Solder Side w10: P1.12 3050,2950 3100,3000 4390,3000 4640.94,2749.06 U3.35
LCD_D6: P1.13 U3.34 | length 1761.3
  Solder Side w10: P1.13 3150,2950 3180,2980 4380,2980 4621.26,2738.74 U3.34
LCD_D7: P1.14 U3.33 | length 1619
  Solder Side w10: P1.14 3250,2950 3260,2960 4370,2960 4601.57,2728.43 U3.33
LCD_EN: P1.6 U3.37 | length 2588.2
  Solder Side w10: P1.6 2450,2950 2540,3040 4410,3040 4680.31,2769.68 U3.37
LCD_PW: U3.39 | length 2902.1
  Solder Side w10: 2150,3000 2230,3080 4430,3080 4719.69,2790.31 U3.39
LCD_RS: P1.3 U3.38 | length 2930.5
  Solder Side w10: P1.3 2150,2950 2260,3060 4420,3060 4700,2780 U3.38
LED_B: Q3.1 R16.1 U3.73 | length 1910.4
  Component Side w10: Q3.1 v3(5962.6,3097.4) 5976.38,3083.62 R16.1
  Solder Side w10: U3.73 5053.15,2103.15 5240,2290 5240,2940 5460,3160 5900,3160 v3(5962.6,3097.4)
LED_G: Q2.1 R15.1 U3.74 | length 1752
  Component Side w10: Q2.1 v3(5812.6,3097.4) 5826.38,3083.62 R15.1
  Solder Side w10: U3.74 5063.46,2083.46 5260,2280 5260,2930 5470,3140 5770,3140 v3(5812.6,3097.4)
LED_R: Q1.1 R14.2 U3.75 | length 1594.5
  Component Side w10: Q1.1 v3(5662.6,3097.4) 5676.38,3083.62 R14.2
  Solder Side w10: U3.75 5071.42,2061.42 5280,2270 5280,2920 5480,3120 5640,3120 v3(5662.6,3097.4)
NetC1_1: C1.1 R1.2 R13.1 S5.1 | length 1221.2
  Component Side w10: S5.1@5097.64,3938.58 5097.64,3947.64 5175,4025 R13.1@5925,4025
  Solder Side w10: C1.1 R1.2
  other v1: 5750,4025
NetC2_1: C2.1 R2.2 R12.2 S4.1 | length 1408.1
  Component Side w10: S4.1@5097.64,3588.58 5414.96,3588.58 5550,3723.62 5550,3875 5600,3925 R12.2@5925,3925
  Solder Side w10: C2.1 R2.2
  other v1: 5850,3925
NetC3_1: C3.1 R3.2 R11.2 S3.1 | length 1306.5
  Component Side w10: S3.1@5097.64,4288.58 5136.42,4288.58 5170,4255 5170,4155 5200,4125 R11.2@5925,4125
  Solder Side w10: C3.1 R3.2
  other v1: 5650,4125
NetC4_1: C4.1 R4.2 R7.2 S2.1 | length 795.2
  Component Side w10: S2.1@5497.64,3938.58 5513.58,3938.58 5550,3975 R7.2@5925,3975
  Solder Side w10: C4.1 R4.2
  other v1: 5800,3975
NetC5_1: C5.1 R5.2 R6.1 S1.1 | length 1636.6
  Component Side w10: S1.1@4697.64,3938.58 4784.06,4025 5125,4025 5175,4075 R6.1@5925,4075
  Solder Side w10: C5.1 R5.2
  other v1: 5700,4075
NetC6_1: C6.1 C7.1 C10.1 C14.2 C19.2 FB1.1 R25.1 R26.1 R27.1 R28.1 U1.1 U1.19 | length 1208.6
  Component Side w10: R28.1 2525,2595 2540,2610 2550,2610 ; R27.1 2575,2595 2560,2610 2550,2610 ; R26.1 2625,2595 2640,2610 2650,2610 ; R25.1 2675,2595 2660,2610 2650,2610 ; v1(3000,2350) 3023.23,2373.23 U1.1 ; U1.19 3023.23,2526.77 v1(3000,2550) 3000,2600 2995,2605 C7.1 C6.1 2930,2612.91 2900,2582.91 C10.1 FB1.1 2717.09,2582.91 2700,2600 2700,2620 2676.5,2643.5 C14.2 ; 2550,2610 C19.2 C14.2 ; 2650,2610 C14.2
  Solder Side w10: v1(3000,2350) v1(3000,2550)
NetC11_1: C11.1 J1.SH R19.2 | length 113.2
  Component Side w10: J1.SH@1967.17,2170.79 1967.17,2122.83 1978.98,2111.02 J1.SH@1978.98,2062.52
NetC12_1: C12.1 C13.1 U1.6 | length 304
  Component Side w10: U1.6 3149.21,2300 3220,2229.21 C12.1 3256.54,2183.46 3268.5,2171.5 C13.1
NetC15_2: C15.2 J2.1 R25.2 U1.21 | length 1063
  Component Side w10: C15.2 R25.2 ; v1(2675,2400) 2750,2400 2810,2460 3023.07,2460 U1.21
  Solder Side w10: v1(2675,2400) 2675,2250 2650,2225 2650,2100 J2.1
NetC16_2: C16.2 J2.3 R26.2 U1.20 | length 1113.1
  Component Side w10: C16.2 v1(2625,2450) R26.2 ; v1(2725,2450) 2760,2450 2789.53,2479.53 U1.20
  Solder Side w10: J2.3 2675,2025 2620,2080 2620,2250 2625,2255 v1(2625,2450) v1(2725,2450)
NetC17_2: C17.2 J2.4 R27.2 U1.23 | length 1382.2
  Component Side w10: C17.2 v1(2575,2400) R27.2 ; v1(2825,2400) 2875,2350 2910,2350 2980.47,2420.47 U1.23
  Solder Side w10: J2.4 2625,2030 2580,2075 2580,2250 2575,2255 v1(2575,2400) 2575,2465 2610,2500 2750,2500 2825,2425 v1(2825,2400)
NetC18_2: C18.2 J2.6 R28.2 U1.22 | length 1392
  Component Side w10: C18.2 v5(2525,2450) R28.2 ; v1(2900,2400) 2940.16,2440.16 U1.22
  Solder Side w10: J2.6 2525,2055 2545,2075 2545,2225 2525,2245 v5(2525,2450) 2600,2525 2775,2525 v1(2900,2400)
NetC22_2: C22.2 R32.1 U1.5 Y1.1 | length 373.2
  Component Side w10: U1.5 3129.53,2279.53 3123.62,2273.62 R32.1 3123.62,2223.62 3118.31,2218.31 Y1.1 3156.54,2183.46 3170,2170 3170,2080 3173.62,2076.38 C22.2
NetC23_2: C23.2 R32.2 U1.4 Y1.3 | length 460.2
  Component Side w10: C23.2 3016.38,2066.38 3031.69,2081.69 Y1.3 2993.46,2116.54 2980,2130 2980,2210 3020,2250 R32.2 3076.38,2276.38 3109.84,2309.84 U1.4
NetC30_2: C30.2 R40.1 U3.29 | length 3184.9
  Solder Side w10: C30.2 2171.5,1998.03 R40.1 2200,2000 2310,2110 2310,2660 2450,2800 4390,2800 4522.83,2667.17 U3.29
NetC31_2: C31.2 R41.1 U3.30 | length 3193.6
  Solder Side w10: C31.2 2171.5,2071.97 2241.97,2071.97 2290,2120 2290,2665 2445,2820 4400,2820 4542.52,2677.48 U3.30
NetC33_1: C33.1 R43.1 Y2.2 | length 353
  Solder Side w10: C33.1 3615,2675 3702.99,2587.01 Y2.2 3786.61,2623.62 R43.1
NetD1_4: D1.4 J1.1 | length 350.7
  Component Side w10: J1.1 2009.68,2021.18 2023.5,2035 2023.5,2120 2063.5,2160 2155.39,2160 D1.4
NetFB2_1: FB2.1 U3.10 U3.12 | length 511.6
  Solder Side w10: FB2.1@3960,2280 4300,2280 4300.31,2280.32 4340,2280.32 ; U3.10 4350,2240.94 4340,2250.94 4340,2280.32 ; U3.12 4340,2280.32
NetJ2_9: J2.9 R35.2 | length 127.9
  Component Side w10: R35.2 2775,2250 2815,2210 J2.9
NetJ2_10: J2.10 R33.1 U1.2 | length 677.6
  Component Side w10: R33.1 2725,2225 2715,2215 J2.10 2715,2160 2765,2110 2850,2110 2870,2130 2870,2230 2950,2310 3030,2310 3070.47,2350.47 U1.2
NetJ2_11: J2.11 R34.2 | length 115.5
  Component Side w10: R34.2 2475,2225 2485,2215 J2.11
NetJ2_12: J2.12 U1.3 | length 949.8
  Component Side w10: J2.12 2475,2075 2855,2075 2890,2110 2890,2220 2960,2290 3040,2290 3090.16,2340.16 U1.3
NetLED1_K: LED1.K R8.2 | length 92.9
  Component Side w10: R8.2 LED1.K
NetLED2_K: LED2.K R9.1 | length 92.9
  Component Side w10: R9.1 LED2.K
NetLED3_K: LED3.K R10.1 | length 92.9
  Component Side w10: R10.1 LED3.K
NetLED4_A: LED4.A R37.1 | length 84.1
  Component Side w10: LED4.A 4226.54,1586.54 4236.38,1596.38 R37.1
NetLED5_A: LED5.A R39.1 | length 110.4
  Component Side w10: R39.1 3166.38,3376.38 3190,3400 3190,3420 3203.46,3433.46 LED5.A
NetP1_5: P1.5 R36.W | length 515.5
  Component Side w10: R36.W 2071.26,2571.26 2350,2850 P1.5
NetQ1_3: Q1.3 R8.1 | length 85
  Component Side w10: Q1.3 R8.1
NetQ2_3: Q2.3 R9.2 | length 85
  Component Side w10: Q2.3 R9.2
NetQ3_3: Q3.3 R10.2 | length 85
  Component Side w10: Q3.3 R10.2
NetQ4_1: Q4.1 R17.1 | length 146.2
  Component Side w10: R17.1 2178.5,1870 2195.91,1887.4 Q4.1
NetQ4_3: Q4.3 R18.1 | length 114.8
  Component Side w10: Q4.3 2121.1,1977.4 2172.13,1926.38
NetR20_2: R20.2 U1.8 | length 232.9
  Component Side w10: U1.8 3199.53,2420.47 3220,2400 3220,2350 3280,2290 R20.2
NetR21_2: R21.2 U1.7 | length 249.9
  Component Side w10: U1.7 3176.77,2343.23 3280,2240 R21.2
NetR23_2: R23.2 R29.1 U1.10 | length 223
  Component Side w10: U1.10 3230.16,2459.84 3290,2400 3325,2400 R23.2@3325,2350
NetR24_2: R24.2 U1.11 | length 160.5
  Component Side w10: U1.11 3240.47,2479.53 3270,2450 R24.2@3325,2450
NetR30_2: R30.2 U7.4 | length 91.4
  Component Side w10: R30.2 3326.38,2571.73 3336.59,2581.95 3356.95,2581.95 3367.24,2592.24 U7.4
NetR31_2: R31.2 U1.24 | length 249.8
  Component Side w10: R31.2 2876.38,2276.38 3000.79,2400.79 U1.24
NetR42_2: R42.2 U8.4 | length 144.6
  Component Side w10: U8.4 3012.6,3507.4 3050,3470 R42.2
NetR47_1: R47.1 R59.1 SD1.2 | length 160.6
  Component Side w10: R47.1 R59.1 5830,2470 5840,2460 5840,2440 5849.84,2430.16 SD1.2
NetR48_1: R48.1 R56.1 SD1.3 | length 139.4
  Component Side w10: R48.1 R56.1 5830,2370 5846.85,2386.85 SD1.3
NetR49_1: R49.1 R55.1 SD1.5 | length 140.6
  Component Side w10: R55.1 R49.1 5820.48,2320 5840.24,2300.24 SD1.5
NetR50_1: R50.1 R54.1 SD1.9 | length 135.3
  Component Side w10: R50.1 R54.1 5835,2120 5842.01,2127.01 SD1.9
NetR51_2: R51.2 U5.8 | length 259.9
  Component Side w10: R51.2 5701.38,1756.38 5715,1770 5825,1770 5850,1795 U5.8
NetR58_1: R58.1 SD1.7 | length 85
  Component Side w10: R58.1 5830,2220 5836.38,2213.62 SD1.7
NetS6_2: S6.2 U4.3 | length 361.4
  Component Side w10: U4.3 3162.6,3527.4 3200,3490 3290,3490 3361.42,3561.42 S6.2@3361.42,3647.64
NetU1_14: U1.14 U7.2 | length 227.6
  Component Side w10: U1.14 3129.53,2559.53 3230,2660 U7.2@3282.76,2660
NetU4_2: U4.2 U8.1 | length 77.6
  Component Side w10: U8.1 3156.69,3647.24 U4.2
RESET: LED5.K R38.1 R42.1 U3.17 U5.3 U5.5 | length 5000.2
  Component Side w10: R42.1 3050,3358.19 3068.19,3340 3225,3340 ; 3100,3340 R38.1 ; LED5.K 3225,3340 ; U5.3 5950,1725 6000,1775 U5.5 6000,1920 5950,1970 4230,1970 3900,2300 v2(3900,2400) 3900,3100 3825,3175 3275,3175 3225,3225 3225,3340
  Solder Side w10: v2(3900,2400) 3921.26,2378.74 U3.17
RSTOUT: U1.15 U3.14 | length 2143.9
  Component Side w10: U1.15 3109.84,2599.84 3140,2630 v3(3140,2700)
  Solder Side w10: v3(3140,2700) 3190,2650 3470,2650 3570,2550 3570,2170 3680,2060 3800,2060 3850,2110 3850,2290 3890,2330 4340,2330 4350.31,2319.69 U3.14
RTCX1: C32.1 U3.16 Y2.1 | length 1115.4
  Solder Side w10: C32.1 3598.62,2511.38 3750.94,2359.06 ; Y2.1 3750,2360 3750.94,2359.06 ; U3.16 3750.94,2359.06
RTCX2: R43.2 U3.18 | length 622.1
  Solder Side w10: R43.2 3900,2475 3976.57,2398.43 U3.18
SD_DETECT: R54.2 | length 51.4
  Component Side w10: v1(5710,2120) R54.2
SD_SSEL: R59.2 U3.79 | length 2153.5
  Component Side w10: v1(5710,2470) R59.2
  Solder Side w10: U3.79 4877.17,1932.83 5210,1600 5820,1600 5880,1660 5880,2300 v1(5710,2470)
SPI_MISO: R51.1 R58.2 U3.77 | length 1686.2
  Component Side w10: v1(5710,2220) R58.2 ; R51.1 v1(5800,1735)
  Solder Side w10: U3.77 4916.54,1953.46 5135,1735 v1(5800,1735) 5820,1755 5820,2170 5770,2220 v1(5710,2220)
SPI_MOSI: R53.2 R56.2 U3.76 U5.1 | length 2656.9
  Component Side w10: v1(5710,2370) R56.2 ; R53.2 v1(5800,1635) 5833.86,1601.14 U5.1
  Solder Side w10: U3.76 4938.58,1961.42 5142.57,1757.43 5757.43,1757.43 5800,1800 5800,2160 5780,2180 5690,2180 5670,2200 5670,2290 5690,2310 5710,2310 ; v1(5710,2370) 5710,2310 ; v1(5800,1635) 5825,1635 5860,1670 5860,2190 5740,2310 5710,2310
SPI_SCK: R55.2 R57.1 U3.78 U5.2 | length 2018.4
  Component Side w10: v1(5710,2270) R55.2 ; R57.1 5870,1685 5900,1655 U5.2
  Solder Side w10: U3.78 4896.85,1943.15 5155,1685 v1(5800,1685) 5825,1685 5840,1700 5840,2180 5750,2270 v1(5710,2270)
UART_RXD: P5.2 U3.47 | length 703.8
  Solder Side w10: P5.2 4600,3050 4877.17,2772.83 U3.47
UART_TXD: P5.1 U3.46 | length 737
  Solder Side w10: P5.1 4500,3100 4857.48,2742.52 U3.46
USB-CONNECT: R17.2 | length 54.7
  Component Side w10: v1(2058.5,1890) 2078.5,1870 R17.2
USB-D+: D1.3 J1.3 R18.2 R40.2 | length 479.2
  Component Side w10: J1.3 v1(2058.5,1970) ; R18.2@2118.5,1920 2108.5,1920 v1(2058.5,1970) ; D1.3 2160.2,2090 2098.5,2090 2068.5,2060 2068.5,1980 v1(2058.5,1970)
  Solder Side w10: v1(2058.5,1970) 2088.5,2000 R40.2
USB-D-: D1.2 J1.2 R41.2 | length 293.4
  Component Side w10: J1.2 2024.09,1995.59 2048.5,2020 2048.5,2090 v1(2058.5,2100) 2091.1,2132.6 D1.2
  Solder Side w10: v1(2058.5,2100) 2088.5,2070 R41.2
VBAT: BT1.1 U3.19 | length 422.9
  Solder Side w10: BT1.1 4081.89,2418.11 U3.19
VCC: C25.1 C27.1 J3.1 P1.2 P1.15 R36.CW U2.3 | length 4174.1
  Component Side w10: R36.CW R36.CW@2050,2733.46
  Component Side w20: R36.CW@2050,2733.46 P1.2 2050,2950 2100,3000 3350,3000 ; U2.3 4119.45,1790.55 4151.5,1758.5 C27.1
  Component Side w30: P1.15 3350,3000 3550,3000 3650,2900 3650,1900
  Component Side w40: U2.3@4072.22,1793.33 4072.22,1827.78
  Component Side w50: 3650,1900 4000,1900 4072.22,1827.78
  Component Side w60: J3.1 3310.63,1900 3650,1900 C25.1
XTAL1: C35.2 U3.22 Y3.3 | length 512.6
  Solder Side w10: C35.2@4100,2673.62 4100,2525 4147.83,2477.17 U3.22 ; 4101.54,2608.46 Y3.3
XTAL2: C34.2 U3.23 Y3.1 | length 310.1
  Solder Side w10: Y3.1 4244.84,2540 4300,2540 ; C34.2 4300,2648.62 4300,2540 ; U3.23 4343.15,2496.85 4300,2540
pads on no net: C25.0 C26.0 J1.0 J1.4 J2.7 J2.13 J2.14 J2.15 J2.16 J3.3 LED1.0 LED2.0 LED3.0 LED4.0 LED5.0 P1.7 P1.8 P1.9 P1.10 S1.0 S2.0 S3.0 S4.0 S5.0 S6.0 SD1.1 SD1.8 SD1.MH1 SD1.MH2 U3.6 U3.13 U3.20 U3.21 U3.24 U3.25 U3.26 U3.27 U3.40 U3.43 U3.44 U3.45 U3.48 U3.49 U3.50 U3.51 U3.52 U3.53 U3.56 U3.57 U3.60 U3.61 U3.62 U3.63 U3.64 U3.70 U3.81 U3.82 U3.85 U3.98 U3.99 U3.100 U7.1 Y1.0 Y3.0

## Polygon pours and split planes (outlines as drawn)
GND on Component Side "Bottom Layer-No Net" (solid, pour order 2): 5450,2750 5450,1500 6450,1500 6450,2750 5450,2750
NetC11_1 on Component Side "Bottom Layer-No Net" (solid, pour order 6): 1750,2250 1750,1700 2100,1700 2100,2250
GND on Component Side "Bottom Layer-No Net" (solid, pour order 11): 2325,2800 2325,1875 2325,1850 2350,1825 2900,1825 3075,2000 3500,2000 3500,2800
GND on Component Side "Bottom Layer-No Net" (solid, pour order 19): 2925,3800 2925,3250 3650,3250 3650,3800
GND on Component Side "Bottom Layer-No Net" (solid, pour order 21): 4350,4000 4350,3700 4700,3350 5150,3350 5200,3350 5550,3700 5550,4000 5200,4350 4750,4350
GND on Solder Side "Bottom Layer-No Net" (solid, pour order 4): 5450,2750 5450,1500 6450,1500 6450,2750 5450,2750
NetC11_1 on Solder Side "Bottom Layer-No Net" (solid, pour order 9): 1750,2250 1750,1700 2100,1700 2100,2250
GND on Solder Side "Bottom Layer-No Net" (solid, pour order 15): 2325,2775 2325,1850 2350,1825 2900,1825 3075,2000 3500,2000 3500,2775
GND on Solder Side "MCU GND" (solid, pour order 23): 5050,2650 5050,1950 4350,1950 4350,2650

## Keep-outs
Keep-Out Layer:
  lines w10: 1750,1500 1750,4450 6450,4450 6450,1500 1750,1500

## Text inside footprints (layer, text, board x,y; h text height)
BT1: Bottom Overlay "+" at 3977.28,2405.51 h45.28 r270
SD1: Mechanical 1 "PCB Edge" at 6461,2595 h9.84 r90